# Altium PCB pedal.PcbDoc
Units mil, origin at the board's own origin, x right, y up, seen from the top; angles counter-clockwise.
Board outline 2410 x 3460 mil, 2 copper layers (Top Layer, Bottom Layer); 22 components, 13 nets, 57 pads, 4 vias.
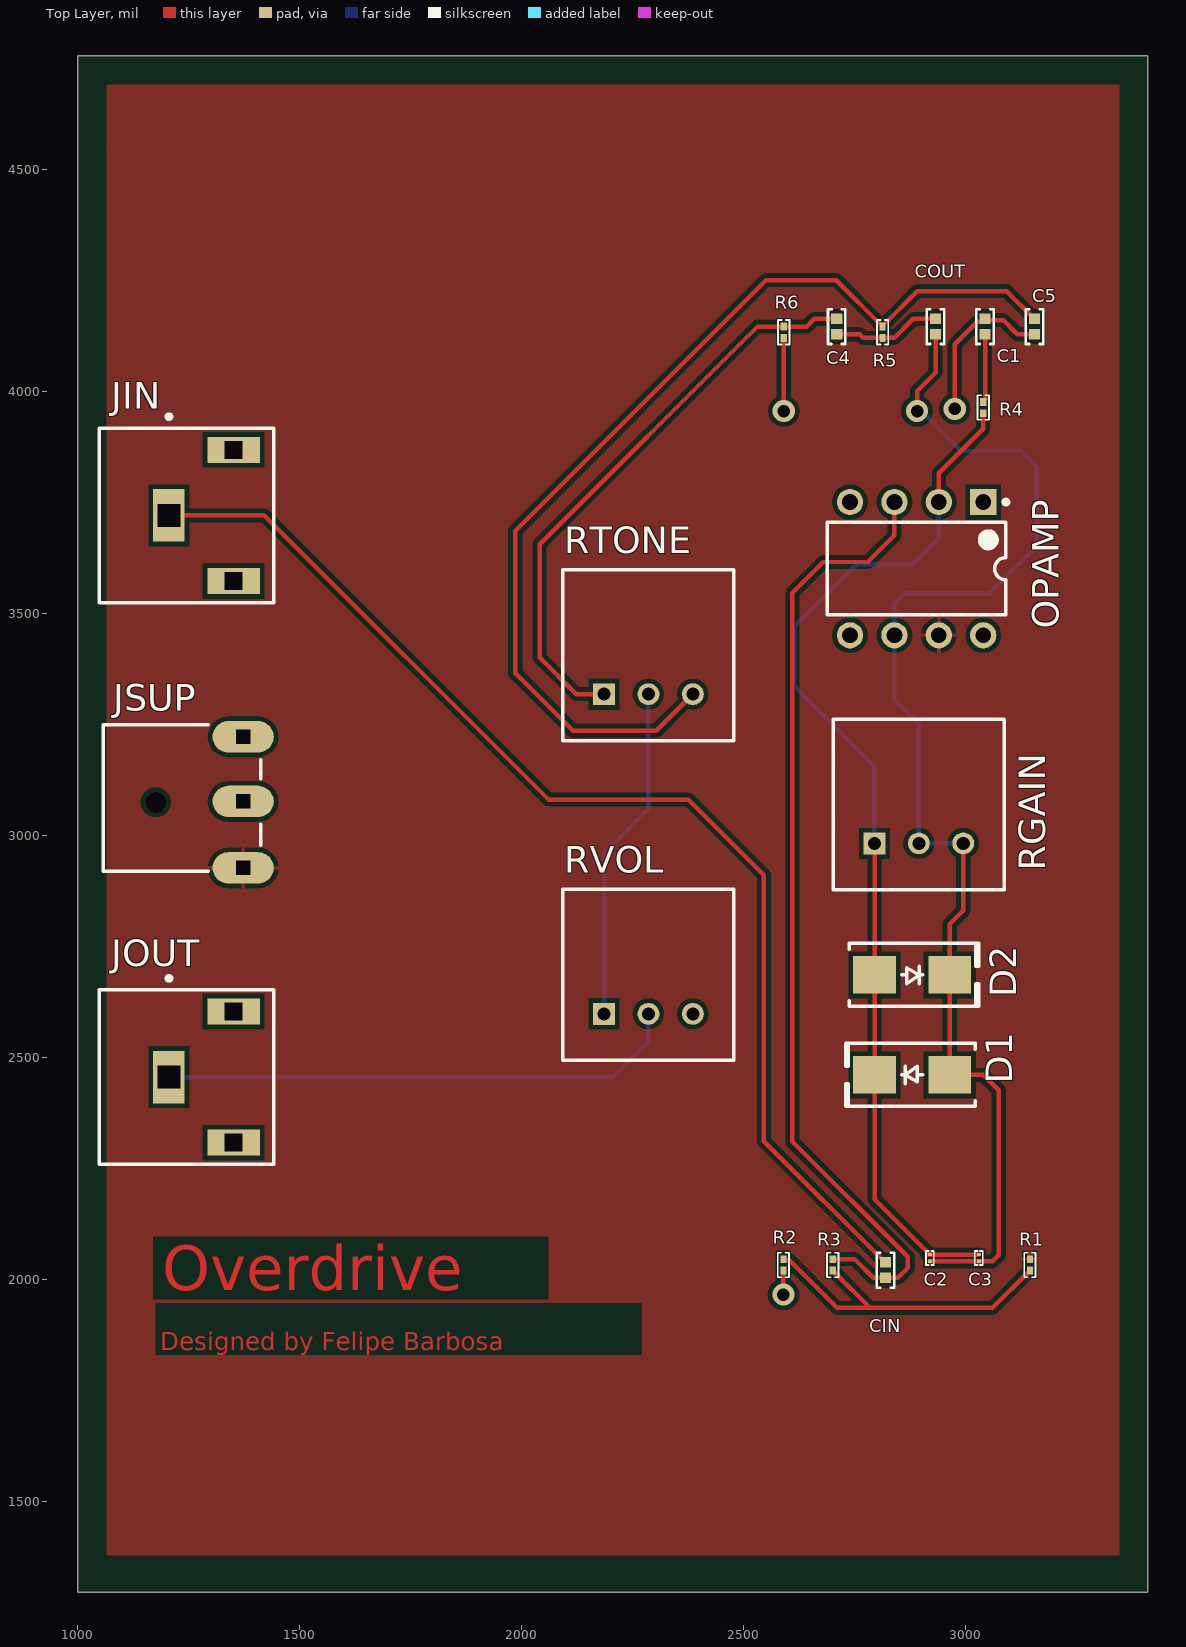
[diagram p0: Top Layer view]
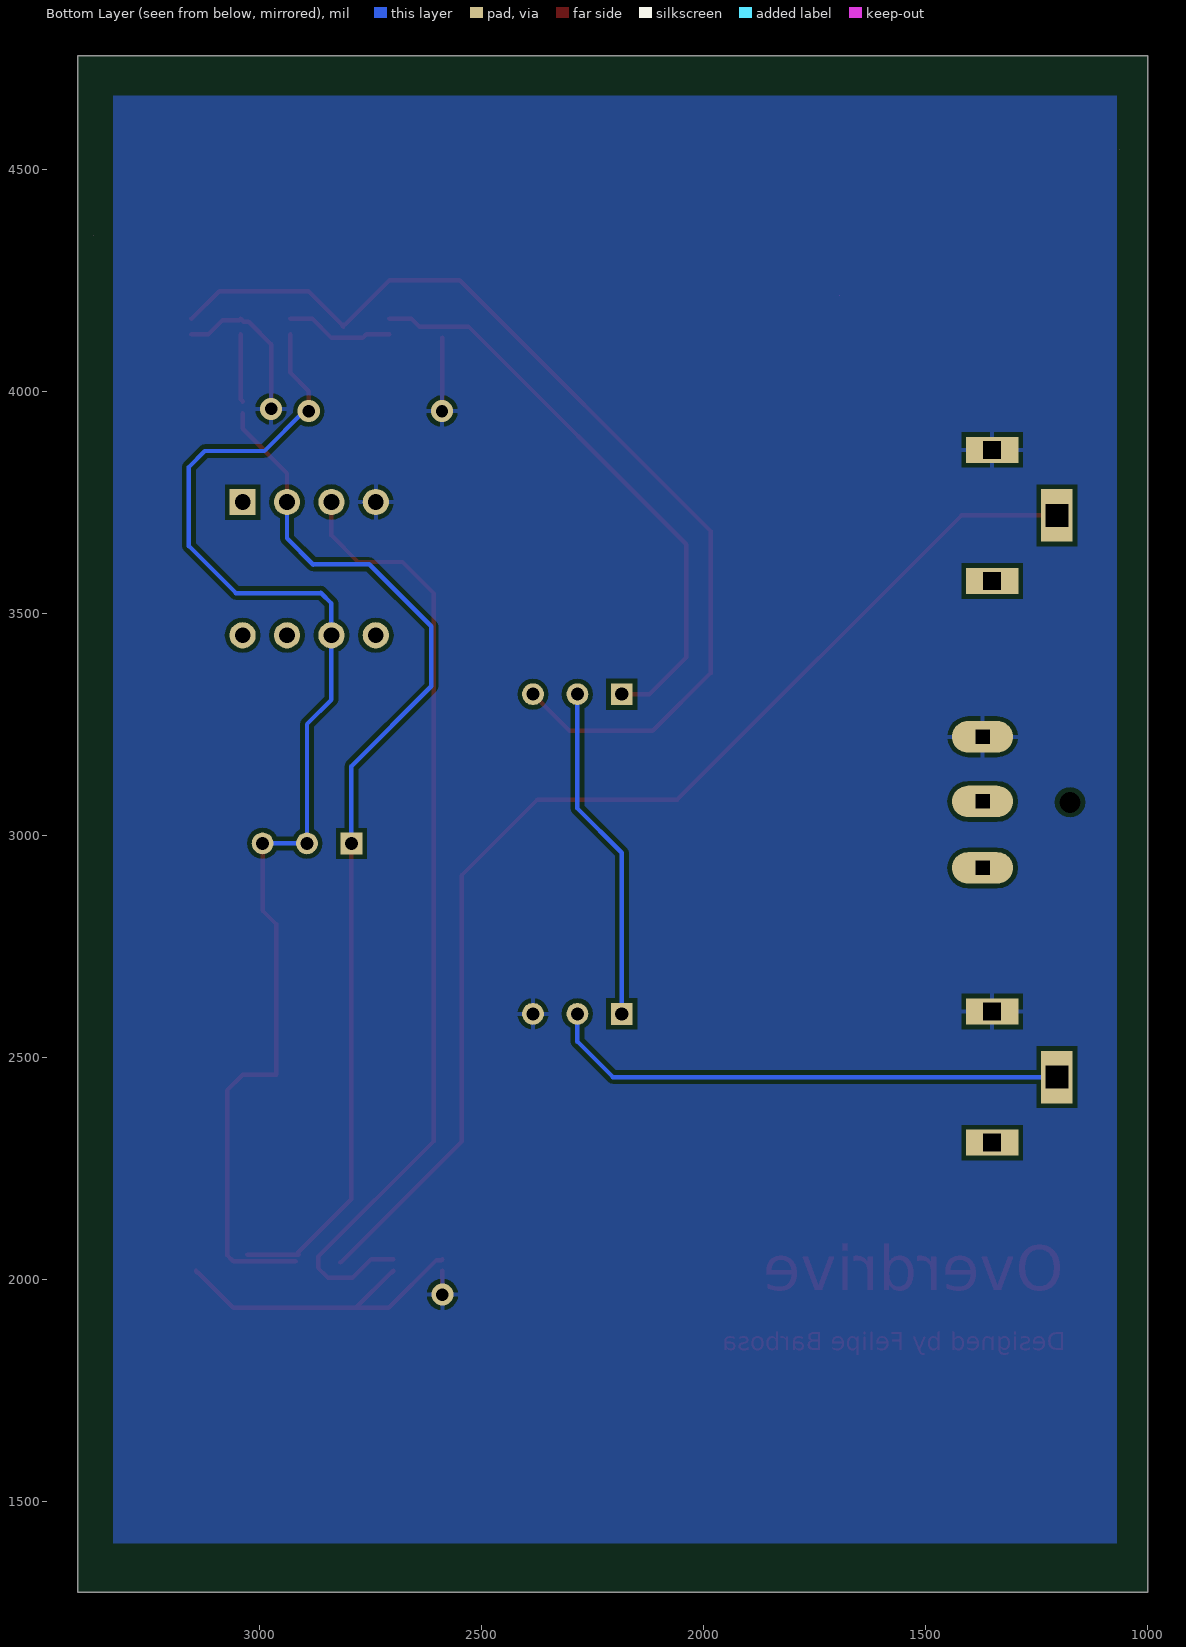
[diagram p1: Bottom Layer view, seen from below]
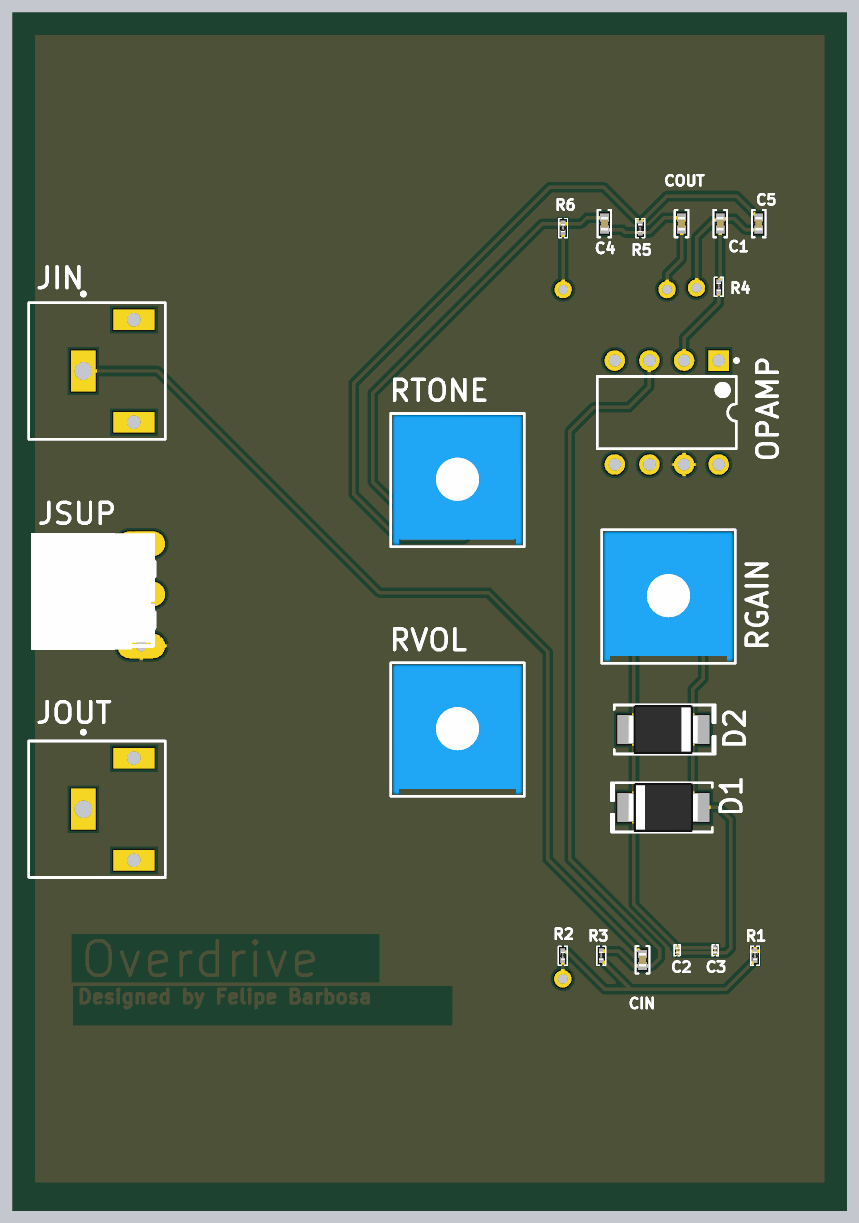
[diagram p2: 3D render of the assembled board from above, using the file's embedded part models]

## Layer stack, top to bottom
Top Solder: solder mask 0.4, Solder Resist, Dk 3.5
Top Layer: signal copper 1.4
Dielectric 1: dielectric 12.6, FR-4, Dk 4.8
Bottom Layer: signal copper 1.4
Bottom Solder: solder mask 0.4, Solder Resist, Dk 3.5

## Board outline
1000,1295 3410,1295 3410,4755 1000,4755
cut-out: 1695,4215
cut-out: 3374.03,4350.1
cut-out: 5035,2000
cut-out: 1065,4545

## Design rules (kind name [scope] priority, off if disabled: settings)
Clearance [All] p1: gap=10 ignorepadtopadclearanceinfootprint=FALSE except(0: Arc-Hole Track-Hole SMDPad-Hole THPad-Hole Via-Hole Fill-Hole Poly-Hole Region-Hole Text-Hole)
PolygonConnect [All] p1: connectstyle=Relief reliefconductorwidth=10 reliefentries=4 polygonreliefangle="90 Angle" airgapwidth=10
RoutingVias [All] p1: holewidth=28 width=50 viastyle="Through Hole" minholewidth=28 minwidth=50 maxholewidth=28 maxwidth=50
SolderMaskExpansion [All] p1: expansion=4 istentingtop=FALSE
Width [All] p1: maxlimit=10 minlimit=4 preferedwidth=10
30 further rules are at their usual default settings.

## Components (designator, comment, footprint, x,y, rotation, side; value= is the part's Value field where it differs from the comment)
C1 "0.22µF" "CAP 0402_1005" 3043.31,4145.45 r90 top
C2 "47pF" "CAP 01005_0402"#1 2919.03,2047.62 r270 top
C3 "47pF" "CAP 01005_0402"#2 3029.03,2047.58 r270 top
C4 "10000pF" "CAP 0402_1005" 2709.03,4145.45 r270 top
C5 "0.033µF" "CAP 0402_1005" 3154.73,4145.45 r90 top
CIN "0.22µF" "CAP 0402_1005" 2818.91,2020.1 r270 top
COUT "4.7µF" "CAP 0402_1005" 2931.88,4145.45 r90 top
D1 "RS1AB-13-F" "DO214AA SMB" 2879.03,2460.1 r180 top
D2 "RS1AB-13-F" "DO214AA SMB" 2879.03,2685.1 r0 top
JIN "PJRAN1X1U01X" SWIT-PJRAN1X1U01X_V 1205,3720 r270 top
JOUT "PJRAN1X1U01X" SWIT-PJRAN1X1U01X_V 1205,2455 r270 top
JSUP "PJ-014D" "CUI PJ-014D" 1234.46,3075.75 r0 top
OPAMP "TL071CP" P0008A 2889.03,3600.1 r270 top
R1 "15 kOhms" "RES 0201_0603" 3144.03,2031.91 r270 top
R2 "15 kOhms" "RES 0201_0603" 2589.03,2031.91 r90 top
R3 "1 MOhms" "RES 0201_0603" 2700.03,2031.91 r270 top
R4 "1 kOhms" "RES 0201_0603" 3039.03,3962.89 r270 top
R5 "27 kOhms" "RES 0201_0603" 2812.59,4132.66 r90 top
R6 "47.5 kOhms" "RES 0201_0603" 2589.74,4132.66 r270 top
RGAIN "470k" FP-3310R-MFG 2894.03,3068.88 r0 top
RTONE "470k" FP-3310R-MFG 2285,3405 r0 top
RVOL "100k" FP-3310R-MFG 2285,2685 r0 top

## Footprints (in the part's own frame and the unit in brackets; to place one, negate y for a bottom-side part, rotate by r counter-clockwise, add the part's x,y. Pads: shape width x height; smd on the part's side, far side on the other; paste and mask are expansions set on the pad)
"CAP 0402_1005" [mm] "Chip Capacitor, 2-Leads, Body 1.02x0.51mm, IPC Medium Density"
  rect 0.6x0.64 smd: 1(-0.44,0) 2(0.44,0)
  silkscreen extent -1,-0.5 1,0.5, body extent -0.5,-0.26 0.5,0.26, height 0.52
"CAP 01005_0402"#1 [mm] "Chip Capacitor, 2-Leads, Body 0.30x0.15mm, IPC Medium Density"
  rect 0.18x0.23 smd paste+0: 1(-0.19,0)
  rect 0.18x0.23 smd: 2(0.19,0)
  silkscreen extent -0.4,-0.22 0.4,0.22, body extent -0.2,-0.1 0.2,0.1, height 0.19
"CAP 01005_0402"#2 [mm] "Chip Capacitor, 2-Leads, Body 0.30x0.15mm, IPC Medium Density"
  rect 0.18x0.23 smd: 1(-0.19,0) 2(0.19,0)
  silkscreen extent -0.4,-0.22 0.4,0.22, body extent -0.2,-0.1 0.2,0.1, height 0.19
"CUI PJ-014D" [mm]
  oval 3.5x1.8 hole 0.8 square: 1(3.5,-3.8) 2(3.5,3.7) 3(3.5,0)
  round 0 hole 1.2 unplated: M(-1.5,-0.05)
  silkscreen extent -4.5,-4 4.5,4.4, body extent -4.5,-4.05 4.5,4.45, height 5.5
"DO214AA SMB" [mm] "Molded Diode, 2-Leads, Body 4.31x3.62mm, IPC Medium Density"
  rect 2.45x2.15 smd: 1(-2.15,0) 2(2.15,0)
  silkscreen extent -3.6,-1.8 3.8,1.8, body extent -2.6,-1.8 2.6,1.8, height 2.4
FP-3310R-MFG [mm]
  rect 1.25x1.25 hole 0.75 paste-1000 mask+0: 1(-2.54,-2.225)
  round 1.25 hole 0.75 paste-1000 mask+0: 2(0,-2.225) 3(2.54,-2.225)
  silkscreen extent -4.89,-4.89 4.89,4.89, body extent -4.99,-4.99 4.99,4.99, height 0.25
P0008A [mm] "DIP, 8-Leads, Body 10.15x6.6mm, Pitch 2.54mm"
  rect 1.5x1.5 hole 0.9: 1(-3.81,3.81)
  round 1.5 hole 0.9: 2(-3.81,1.27) 3(-3.81,-1.27) 4(-3.81,-3.81) 5(3.81,-3.81) 6(3.81,-1.27) 7(3.81,1.27) 8(3.81,3.81)
  silkscreen extent -3.93,-5.1 2.65,5.24, body extent -3.95,-5.07 3.95,5.07, height 5.08
"RES 0201_0603" [mm] "Chip Resistor, 2-Leads, Body 0.60x0.30mm, IPC Medium Density"
  rect 0.44x0.35 smd: 1(-0.325,0) 2(0.325,0)
  silkscreen extent -0.7,-0.33 0.7,0.33, body extent -0.3,-0.15 0.3,0.15, height 0.21
SWIT-PJRAN1X1U01X_V [mm] "Jack, 3-Leads, Body 19.5x10mm"
  rect 3x1.8 hole 1.3 square paste-1: 1(0,0)
  rect 1.5x3 hole 1 square paste-1: 2(-3.75,3.7) 3(3.75,3.7)
  silkscreen extent -5.77,-4 5,6, body extent -5,-13.5 5,6, height 13

## Part data
C1 CIN: library part 0402BW224K160YT, "CAP CER 0.22UF 16V X5R 0402", Device Package="0402 (1005 Metric)", Manufacturer="Knowles Novacap", Operating Temperature="-55°C ~ 85°C", Supplier Part Number 1=1763-1189-1-ND, Temperature Coefficient=X5R, Tolerance=±10%, Voltage - Rated=16V, Applications="General Purpose", Capacitance=0.22µF, ComponentLink1Description=Datasheet, ComponentLink1URL=https://www.knowlescapacitors.com/getattachment/6c8d48ef-fc2b-4752-ae2c-ce6c208de0c4/High-Capacitance-Chip.aspx, ComponentLink2Description="DigiKey Link", ComponentLink2URL=http://digikey.com/product-detail/en/knowles-novacap/0402BW224K160YT/1763-1189-1-ND/7304304, LastUpdated="02/09/2020 01:02:25", Lifecycle Status=Active, Minimum Order=1, Mounting Type="Surface Mount, MLCC", Package / Case="0402 (1005 Metric)", Packaging=TapeAndReel, Part Number=0402BW224K160YT, Part Status=Active, PartId=1712, Price=0.47, Series=-, Size / Dimension="0.040\" L x 0.020\" W (1.02mm x 0.51mm)", Supplier 1=DigiKey, Thickness (Max)="0.024\" (0.61mm)"
C2 C3: library part GRM0225C1E470GA02L, "CAP CER 47PF 25V C0G/NP0 01005", Device Package="01005 (0402 Metric)", Manufacturer="Murata Electronics", Operating Temperature="-55°C ~ 125°C", Supplier Part Number 1=490-10133-1-ND, Temperature Coefficient="C0G, NP0", Tolerance=±2%, Voltage - Rated=25V, Applications="General Purpose", Capacitance=47pF, ComponentLink1Description=Datasheet, ComponentLink1URL=https://search.murata.co.jp/Ceramy/image/img/A01X/G101/ENG/GRM0225C1E470GA02-01.pdf, ComponentLink2Description="DigiKey Link", ComponentLink2URL=http://digikey.com/product-detail/en/murata-electronics/GRM0225C1E470GA02L/490-10133-1-ND/5026000, LastUpdated="02/09/2020 01:27:43", Lifecycle Status=Active, Minimum Order=1, Mounting Type="Surface Mount, MLCC", Package / Case="01005 (0402 Metric)", Packaging=TapeAndReel, Part Number=GRM0225C1E470GA02L, Part Status=Active, Price=0.01, Series=GRM, Size / Dimension="0.016\" L x 0.008\" W (0.40mm x 0.20mm)", Supplier 1=DigiKey, Thickness (Max)="0.009\" (0.22mm)"
C4: library part C0402C103K4RECAUTO, "CAP CER 0402 10NF 16V X7R 10%", Device Package="0402 (1005 Metric)", Manufacturer=KEMET, Operating Temperature="-55°C ~ 125°C", Ratings=AEC-Q200, Supplier Part Number 1=399-17876-1-ND, Temperature Coefficient=X7R, Tolerance=±10%, Voltage - Rated=16V, Applications="Automotive, ESD Protection", Capacitance=10000pF, ComponentLink1Description=Datasheet, ComponentLink1URL=https://api.kemet.com/component-edge/download/datasheet/C0402C103K4RECAUTO.pdf, ComponentLink2Description="DigiKey Link", ComponentLink2URL=http://digikey.com/product-detail/en/kemet/C0402C103K4RECAUTO/399-17876-1-ND/8640543, LastUpdated="02/09/2020 01:02:25", Lifecycle Status=Active, Minimum Order=1, Mounting Type="Surface Mount, MLCC", Package / Case="0402 (1005 Metric)", Packaging=TapeAndReel, Part Number=C0402C103K4RECAUTO, Part Status=Active, PartId=1725, Price=0.02, Series="ESD SMD Auto X7R", Size / Dimension="0.039\" L x 0.020\" W (1.00mm x 0.50mm)", Supplier 1=DigiKey, Thickness (Max)="0.022\" (0.55mm)"
C5: library part 0402B333K250CT, "CAP CER 0.033UF 25V X7R 0402", Device Package="0402 (1005 Metric)", Manufacturer="Walsin Technology Corporation", Operating Temperature="-55°C ~ 125°C", Supplier Part Number 1=1292-1204-1-ND, Temperature Coefficient=X7R, Tolerance=±10%, Voltage - Rated=25V, Applications="General Purpose", Capacitance=0.033µF, ComponentLink1Description=Datasheet, ComponentLink1URL=http://www.passivecomponent.com/wp-content/uploads/2018/10/MLCC.pdf, ComponentLink2Description="DigiKey Link", ComponentLink2URL=http://digikey.com/product-detail/en/walsin-technology-corporation/0402B333K250CT/1292-1204-1-ND/9355208, LastUpdated="02/09/2020 01:02:24", Lifecycle Status=Active, Minimum Order=1, Mounting Type="Surface Mount, MLCC", Package / Case="0402 (1005 Metric)", Packaging=TapeAndReel, Part Number=0402B333K250CT, Part Status=Active, PartId=1968, Price=0.01, Series=-, Size / Dimension="0.039\" L x 0.020\" W (1.00mm x 0.50mm)", Supplier 1=DigiKey, Thickness (Max)="0.022\" (0.55mm)"
COUT: library part CL05A475MO5NUNC, "CAP CER 4.7UF 16V X5R 0402", Device Package="0402 (1005 Metric)", Manufacturer="Samsung Electro-Mechanics", Operating Temperature="-55°C ~ 85°C", Supplier Part Number 1=1276-6836-1-ND, Temperature Coefficient=X5R, Tolerance=±20%, Voltage - Rated=16V, Applications="General Purpose", Capacitance=4.7µF, ComponentLink1Description=Datasheet, ComponentLink1URL=http://www.samsungsem.com/kr/support/product-search/mlcc/__icsFiles/afieldfile/2019/05/29/Data%20sheet_CL05A475MO5NUNC.pdf, ComponentLink2Description="DigiKey Link", ComponentLink2URL=http://digikey.com/product-detail/en/samsung-electro-mechanics/CL05A475MO5NUNC/1276-6836-1-ND/5961695, LastUpdated="02/09/2020 01:02:25", Lifecycle Status=Active, Minimum Order=1, Mounting Type="Surface Mount, MLCC", Package / Case="0402 (1005 Metric)", Packaging=TapeAndReel, Part Number=CL05A475MO5NUNC, Part Status=Active, PartId=1760, Price=0.10, Series=CL, Size / Dimension="0.039\" L x 0.020\" W (1.00mm x 0.50mm)", Supplier 1=DigiKey, Thickness (Max)="0.022\" (0.55mm)"
D1 D2: "DIODE GEN PURP 50V 1A SMB", Capacitance @ Vr, F="15pF @ 4V, 1MHz", Current - Average Rectified (Io)=1A, Current - Reverse Leakage @ Vr="5µA @ 50V", Manufacturer="Diodes Incorporated", Operating Temperature - Junction="-65°C ~ 150°C", Package / Case="DO-214AA, SMB", Supplier Device Package=SMB, Supplier Part Number 1=RS1AB-FDICT-ND, Voltage - DC Reverse (Vr) (Max)=50V, Voltage - Forward (Vf) (Max) @ If="1.3V @ 1A", ComponentLink1Description=Datasheet, ComponentLink1URL=https://www.diodes.com/assets/Datasheets/ds15002.pdf, ComponentLink2Description="DigiKey Link", ComponentLink2URL=http://digikey.com/product-detail/en/diodes-incorporated/RS1AB-13-F/RS1AB-FDICT-ND/815907, Diode Type=Standard, LastUpdated="02/09/2020 01:18:53", Lifecycle Status=Active, Minimum Order=1, Mounting Type="Surface Mount", Packaging=TapeAndReel, Part Number=RS1AB-13-F, Part Status=Active, PartId=27, Price=0.09, Reverse Recovery Time (trr)=150ns, Series=-, Speed="Fast Recovery =< 500ns, > 200mA (Io)", Supplier 1=DigiKey
JIN JOUT: library part CMP-1772-00003-1, "Female Phono Jack, 3 Position, Height 13 mm, Tail Length 4 mm, RoHS, Bulk", Capacitance="100 nF", Case\Package=Radial, Max Operating Temperature="125 degC", Min Operating Temperature="-55 degC", Package Quantity=500, Tolerance=10%, Type (Capacitors)=X7R, Voltage Rating="50 V", ComponentLink1Description="Manufacturer URL", ComponentLink1URL=http://www.switchcraft.com/, ComponentLink2Description=Datasheet, ComponentLink2URL=http://www.conxall.com/Drawings/pjran1x1u__x_series_cd.pdf, DatasheetVersion="Rev. A, 01/2006", Height="3.18 mm", Lead Pitch="2.54 mm", Length="6.6 mm", Mount="Through Hole", PackageDescription="Female Phono Jack, 3 Position, Height 13 mm, Tail Length 4 mm", PackageReference=PJRAN1X1U01X, Packaging=Bulk, Pins=2, Radiation Hardening=No, REACH SVHC="No SVHC", RoHSCompliant=true, Voltage Rating (DC)="50 V", Width="5.08 mm"
JSUP: "CONN PWR JACK 1.3X3.4MM SOLDER", Current Rating (Amps)=2.5A, Manufacturer="CUI Devices", Material Flammability Rating="UL94 V-0", Supplier Part Number 1=CP-014D-ND, Voltage - Rated=24VDC, Actual Diameter="0.051\" (1.30mm ID), 0.165\" (4.20mm OD)", ComponentLink1Description=Datasheet, ComponentLink1URL=https://www.cuidevices.com/product/resource/digikeypdf/pj-014d.pdf, ComponentLink2Description="DigiKey Link", ComponentLink2URL=//digikey.com/product-detail/en/cui-devices/PJ-014D/CP-014D-ND/372124, Connector Type=Jack, Features="Board Guide", Gender=Male, Industry Recognized Mating Diameter="1.30mm ID (0.051\"), 3.40mm OD (0.134\")", Internal Switch(s)="Single Switch, Normally Closed", LastUpdated="16/12/2019 18:55:00", Lifecycle Status=0, Mating Length/Depth="0.283\" (7.20mm)", Minimum Order=1, Mounting Type="Through Hole, Right Angle", Number of Positions/Contacts="2 Conductors, 3 Contacts", Packaging=Bulk, Part Number=PJ-014D, Part Status=Active, Price=0.65, Series=-, Shielding=Unshielded, Supplier 1=DigiKey, Termination=Solder
OPAMP: library part CMP-0017-00972-2, "Low-Noise JFET-Input General-Purpose Operational Amplifier, 7 to 36 V, 0 to 70 degC, 8-pin DIP (P8), Pb-Free (RoHS)", Manufacturer="Texas Instruments", Rating=Military, Total Supply Voltage(Max)(+5V is 5, +/-5V is 10)=36, Total Supply Voltage(Min)(+5V is 5, +/-5V is 10)=7, CMRR(Min)(dB)=70, Code_JEDEC=MS-001, ComponentLink1Description="Manufacturer URL", ComponentLink1URL=http://www.ti.com/, ComponentLink2Description=Datasheet, ComponentLink2URL=http://www.ti.com/lit/ds/symlink/tl071.pdf, ComponentLink3Description="Package Specification", ComponentLink3URL=http://www.ti.com/litv/pdf/mpdi001b, DatasheetVersion=SLOS080J, Eco-Plan="Pb-Free (RoHS)", GBW(Typ)(MHz)=3, IIB(Max)(pA)=200, Iq per channel(Max)(mA)=2.5, Mounting Technology="Through Hole", Number of Channels=1, Offset Drift(Typ)(uV/C)=18, PackageDescription="8-Pin Plastic In-Line, Body 9.59 x 6.35 mm, Pitch 2.54 mm", PackageReference=P0008A, PackageVersion="4040082/E, 04/2010", PartNumber=TL071CP, Slew Rate(Typ)(V/us)=13, Sub Family="General Purpose Amplifier, High Supply Voltage Amplifier (>=30V)", Vio (25C)(Max)(mV)=10, Vn at 1kHz(Typ)(nV/rtHz)=18
R1 R2: library part RK73B1HTTC153J, "RES 15K OHM 5% 1/20W 0201", Device Package="0201 (0603 Metric)", Manufacturer="KOA Speer Electronics, Inc.", Operating Temperature="-55°C ~ 155°C", Power (Watts)="0.05W, 1/20W", Ratings=AEC-Q200, Supplier Device Package=0201, Supplier Part Number 1=2019-RK73B1HTTC153JCT-ND, Temperature Coefficient=±200ppm/°C, Tolerance=±5%, ComponentLink1Description=Datasheet, ComponentLink1URL=http://www.koaspeer.com/catimages/Products/RK73B/RK73B.pdf, ComponentLink2Description="DigiKey Link", ComponentLink2URL=http://digikey.com/product-detail/en/koa-speer-electronics-inc/RK73B1HTTC153J/2019-RK73B1HTTC153JCT-ND/9845771, Composition="Thick Film", Features="Automotive AEC-Q200, Moisture Resistant", Height - Seated (Max)="0.010\" (0.26mm)", LastUpdated="02/09/2020 01:06:23", Lifecycle Status=Active, Minimum Order=1, Number of Terminations=2, Package / Case="0201 (0603 Metric)", Packaging=CutTape, Part Number=RK73B1HTTC153J, Part Status=Active, PartId=735, Price=0.10, Resistance="15 kOhms", Series=RK73B, Size / Dimension="0.024\" L x 0.012\" W (0.60mm x 0.30mm)", Supplier 1=DigiKey
R3: library part RMCF0201JT1M00, "RES 1M OHM 5% 1/20W 0201", Device Package="0201 (0603 Metric)", Manufacturer="Stackpole Electronics Inc", Operating Temperature="-55°C ~ 125°C", Power (Watts)="0.05W, 1/20W", Supplier Device Package=0201, Supplier Part Number 1=RMCF0201JT1M00CT-ND, Temperature Coefficient=±200ppm/°C, Tolerance=±5%, ComponentLink1Description=Datasheet, ComponentLink1URL=https://www.seielect.com/catalog/sei-rmcf_rmcp.pdf, ComponentLink2Description="DigiKey Link", ComponentLink2URL=http://digikey.com/product-detail/en/stackpole-electronics-inc/RMCF0201JT1M00/RMCF0201JT1M00CT-ND/3931515, Composition="Thick Film", Height - Seated (Max)="0.010\" (0.26mm)", LastUpdated="02/09/2020 01:06:21", Lifecycle Status=Active, Minimum Order=1, Number of Terminations=2, Package / Case="0201 (0603 Metric)", Packaging=CutTape, Part Number=RMCF0201JT1M00, Part Status=Active, PartId=992, Price=0.10, Resistance="1 MOhms", Series=RMCF, Size / Dimension="0.024\" L x 0.012\" W (0.60mm x 0.30mm)", Supplier 1=DigiKey
R4: library part RMCF0201JT1K00, "RES 1K OHM 5% 1/20W 0201", Device Package="0201 (0603 Metric)", Manufacturer="Stackpole Electronics Inc", Operating Temperature="-55°C ~ 125°C", Power (Watts)="0.05W, 1/20W", Supplier Device Package=0201, Supplier Part Number 1=RMCF0201JT1K00CT-ND, Temperature Coefficient=±200ppm/°C, Tolerance=±5%, ComponentLink1Description=Datasheet, ComponentLink1URL=https://www.seielect.com/catalog/sei-rmcf_rmcp.pdf, ComponentLink2Description="DigiKey Link", ComponentLink2URL=http://digikey.com/product-detail/en/stackpole-electronics-inc/RMCF0201JT1K00/RMCF0201JT1K00CT-ND/3931523, Composition="Thick Film", Height - Seated (Max)="0.010\" (0.26mm)", LastUpdated="02/09/2020 01:06:22", Lifecycle Status=Active, Minimum Order=1, Number of Terminations=2, Package / Case="0201 (0603 Metric)", Packaging=CutTape, Part Number=RMCF0201JT1K00, Part Status=Active, PartId=791, Price=0.10, Resistance="1 kOhms", Series=RMCF, Size / Dimension="0.024\" L x 0.012\" W (0.60mm x 0.30mm)", Supplier 1=DigiKey
R5: library part RK73B1HTTC273J, "RES 27K OHM 5% 1/20W 0201", Device Package="0201 (0603 Metric)", Manufacturer="KOA Speer Electronics, Inc.", Operating Temperature="-55°C ~ 155°C", Power (Watts)="0.05W, 1/20W", Ratings=AEC-Q200, Supplier Device Package=0201, Supplier Part Number 1=2019-RK73B1HTTC273JCT-ND, Temperature Coefficient=±200ppm/°C, Tolerance=±5%, ComponentLink1Description=Datasheet, ComponentLink1URL=http://www.koaspeer.com/catimages/Products/RK73B/RK73B.pdf, ComponentLink2Description="DigiKey Link", ComponentLink2URL=http://digikey.com/product-detail/en/koa-speer-electronics-inc/RK73B1HTTC273J/2019-RK73B1HTTC273JCT-ND/9845778, Composition="Thick Film", Features="Automotive AEC-Q200, Moisture Resistant", Height - Seated (Max)="0.010\" (0.26mm)", LastUpdated="02/09/2020 01:06:24", Lifecycle Status=Active, Minimum Order=1, Number of Terminations=2, Package / Case="0201 (0603 Metric)", Packaging=TapeAndReel, Part Number=RK73B1HTTC273J, Part Status=Active, PartId=411, Price=0.01, Resistance="27 kOhms", Series=RK73B, Size / Dimension="0.024\" L x 0.012\" W (0.60mm x 0.30mm)", Supplier 1=DigiKey
R6: library part RK73H1HTTC4752F, "RES 47.5K OHM 1% 1/20W 0201", Device Package="0201 (0603 Metric)", Manufacturer="KOA Speer Electronics, Inc.", Operating Temperature="-55°C ~ 155°C", Power (Watts)="0.05W, 1/20W", Ratings=AEC-Q200, Supplier Device Package=0201, Supplier Part Number 1=2019-RK73H1HTTC4752FCT-ND, Temperature Coefficient=±200ppm/°C, Tolerance=±1%, ComponentLink1Description=Datasheet, ComponentLink1URL=http://www.koaspeer.com/catimages/Products/RK73H/RK73H.pdf, ComponentLink2Description="DigiKey Link", ComponentLink2URL=http://digikey.com/product-detail/en/koa-speer-electronics-inc/RK73H1HTTC4752F/2019-RK73H1HTTC4752FCT-ND/9845882, Composition="Thick Film", Features="Automotive AEC-Q200, Moisture Resistant", Height - Seated (Max)="0.010\" (0.26mm)", LastUpdated="02/09/2020 01:06:23", Lifecycle Status=Active, Minimum Order=1, Number of Terminations=2, Package / Case="0201 (0603 Metric)", Packaging=TapeAndReel, Part Number=RK73H1HTTC4752F, Part Status=Active, PartId=607, Price=0.01, Resistance="47.5 kOhms", Series=RK73H, Size / Dimension="0.024\" L x 0.012\" W (0.60mm x 0.30mm)", Supplier 1=DigiKey
RGAIN RTONE: library part CMP-07234-000023-1, "470k -0k", Max Operating Temperature=125°C, Max Power Dissipation=250mW, Min Operating Temperature=-40°C, Package Quantity=50, Resistance=10kR, Temperature Coefficient=1000ppm/°C, Tolerance=20%, Actuator Diameter=0.125inch, Actuator Length=0.22inch, Composition="Conductive Plastic", Contact Plating=Tin, Mount="Through Hole", Number of Gangs=1, Number of Turns=1, Packaging=Bulk, Power Rating=250mW, REACH SVHC="No SVHC", Taper=Linear, Termination=Pin, Type=Potentiometer, Weight=4.5g
RVOL: library part CMP-07234-000023-1, "100k -0k", Max Operating Temperature=125°C, Max Power Dissipation=250mW, Min Operating Temperature=-40°C, Package Quantity=50, Resistance=10kR, Temperature Coefficient=1000ppm/°C, Tolerance=20%, Actuator Diameter=0.125inch, Actuator Length=0.22inch, Composition="Conductive Plastic", Contact Plating=Tin, Mount="Through Hole", Number of Gangs=1, Number of Turns=1, Packaging=Bulk, Power Rating=250mW, REACH SVHC="No SVHC", Taper=Linear, Termination=Pin, Type=Potentiometer, Weight=4.5g

## Via types
v1: diameter 50, hole 28, Top Layer to Bottom Layer, 4 vias

## Nets (pads, with @x,y where several pads share a name; then routed paths per layer and width w, separated by ;. In a path a pad name is that pad's centre, name@x,y a point inside that pad or via, vN(x,y) a via of type N, cw(c..) or ccw(c..) an arc to the next point about the centre after c; other vN are vias at no path point)
GND: C1.2 C5.1 JIN.2 JOUT.2 JSUP.2 OPAMP.4 R2.1 R6.2 RVOL.3 | length 582.3
  Top Layer w10: v1(2589.03,1965.1) R2.1 ; R6.2 2589.87,4119.73 2589.87,3955.13 v1(2590,3955) ; v1(2975,3960) 2975,4105.44 3025.52,4155.97 3036.5,4155.97 C1.2 3045.99,4160.1 3084.03,4160.1 3116,4128.13 C5.1
NetC1_1: C1.1 R4.1 | length 154.2
  Top Layer w10: R4.1 3039.03,3977.46 3043.31,3981.74 C1.1
NetC2_1: C2.1 C3.1 D1.2 D2.1 OPAMP.2 R4.2 RGAIN.1 | length 2384.1
  Top Layer w10: RGAIN.1 2794.39,2980.93 D2.1 D1.2 2794.39,2179.75 C2.1@2915.93,2058.2 ; 2912.93,2055.19 2918.93,2055.2 C2.1 ; C2.1@2919.03,2055.2 C3.1@3029.03,2055.27 ; OPAMP.2 2939.03,3815.1 3039.03,3915.1 R4.2
  Bottom Layer w10: RGAIN.1 2794.03,3155.1 2614.03,3335.1 2614.03,3470.1 2754.03,3610.1 2879.03,3610.1 2879.89,3609.24 2939.03,3668.38 OPAMP.2
NetC2_2: C2.2 C3.2 COUT.1 D1.1 D2.2 OPAMP.6 RGAIN.2 RGAIN.3 | length 2920.1
  Top Layer w10: v1(2890,3955) 2890,4000 2931.88,4041.88 COUT.1 ; C2.2 3060,2040 3074.13,2054.13 3074.13,2425 3039.03,2460.1 D1.1 D2.2 2963.68,2799.75 2994.03,2830.1 RGAIN.3 ; C2.2 C2.2@2919.27,2039.9
  Bottom Layer w10: v1(2890,3955) 2900,3955 2989.9,3865.1 3124.03,3865.1 3160,3829.13 3160,3651.07 3054.03,3545.1 2864.03,3545.1 2863.18,3545.96 2839.03,3521.82 OPAMP.6 2839.03,3305.1 2894.03,3250.1 RGAIN.2 RGAIN.3
NetC4_1: C4.1 R6.1 RTONE.1 | length 1313.6
  Top Layer w10: RTONE.1 2122.6,3317.4 2040,3400 2040,3655 2530.45,4145.45 R6.1 2641.27,4145.45 2658.6,4162.78 C4.1
NetC4_2: C4.2 COUT.2 R5.1 | length 244.1
  Top Layer w10: C4.2 2760.49,4128.13 2768.76,4119.86 R5.1 2838.8,4119.86 2881.71,4162.78 COUT.2
NetC5_2: C5.2 R5.2 RTONE.3 | length 2315.9
  Top Layer w10: RTONE.3 2302.6,3235 2115,3235 1985,3365 1985,3685 2550,4250 2708.04,4250 2808.92,4149.12 2810.7,4149.12 2812.59,4147.23 R5.2 2813.31,4146.18 2813.31,4147.95 2890.46,4225.1 3091.62,4225.1 3153.95,4162.78 C5.2
NetCIN_1: CIN.1 JIN.1 | length 2662
  Top Layer w10: JIN.1 1420,3720 2060,3080 2375,3080 2545,2910 2545,2310.54 2818.12,2037.42 CIN.1
NetCIN_2: CIN.2 OPAMP.3 R3.1 | length 2182.5
  Top Layer w10: R3.1 2700.43,2045.1 2749.03,2045.1 2791.36,2002.78 CIN.2 2846.71,2002.78 2869.03,2025.1 2869.03,2050.1 2609.03,2310.1 2609.03,3545.1 2679.03,3615.1 2779.03,3615.1 2839.03,3675.1 OPAMP.3
NetJOUT_1: JOUT.1 RVOL.2 | length 1175.5
  Bottom Layer w10: JOUT.1 2205,2455 2285,2535 RVOL.2
NetJSUP_1: JSUP.1 OPAMP.7 R1.1
NetR1_2: R1.2 R2.2 R3.2 | length 756.1
  Top Layer w10: R2.2 2590.92,2042.78 2602.14,2042.78 2709.81,1935.1 2784.05,1935.1 ; R3.2 2700.03,2017.34 2701.92,2015.45 2703.7,2015.45 2784.05,1935.1 ; R1.2 3144.03,2017.34 3142.14,2015.45 3140.37,2015.45 3060.02,1935.1 2784.05,1935.1
NetRTONE_2: RTONE.2 RVOL.1 | length 761.4
  Bottom Layer w10: RVOL.1 2185,2960 2285,3060 RTONE.2
pads on no net: JIN.3 JOUT.3 JSUP.3 JSUP.M OPAMP.1 OPAMP.5 OPAMP.8

## Polygon pours and split planes (outlines as drawn)
NetJSUP_1 on Top Layer "9V_LAYER" (solid, pour order 3): 1065,4690 3345,4690 3345,1377.5 1065,1377.5
no net on Top Layer "NONET_L01_P002" (solid, pour order 2): 1780,4220
GND on Bottom Layer "GND_PLANE" (solid, pour order 1): 3330,4665 3330,1405 1070.26,1405 1070.26,4665

## Other copper
Top Layer:
  text "Overdrive" at 1190,1975 h100
  text "Designed by Felipe Barbosa" at 1185,1840 h40

## Text inside footprints (layer, text, board x,y; h text height)
JIN: Mechanical 6 "PCB Edge" at 985,3505 h25.59 r270
JOUT: Mechanical 6 "PCB Edge" at 985,2240 h25.59 r270